# EAGLE board Timelapse_camera_RevB (EAGLE 7.5.0)
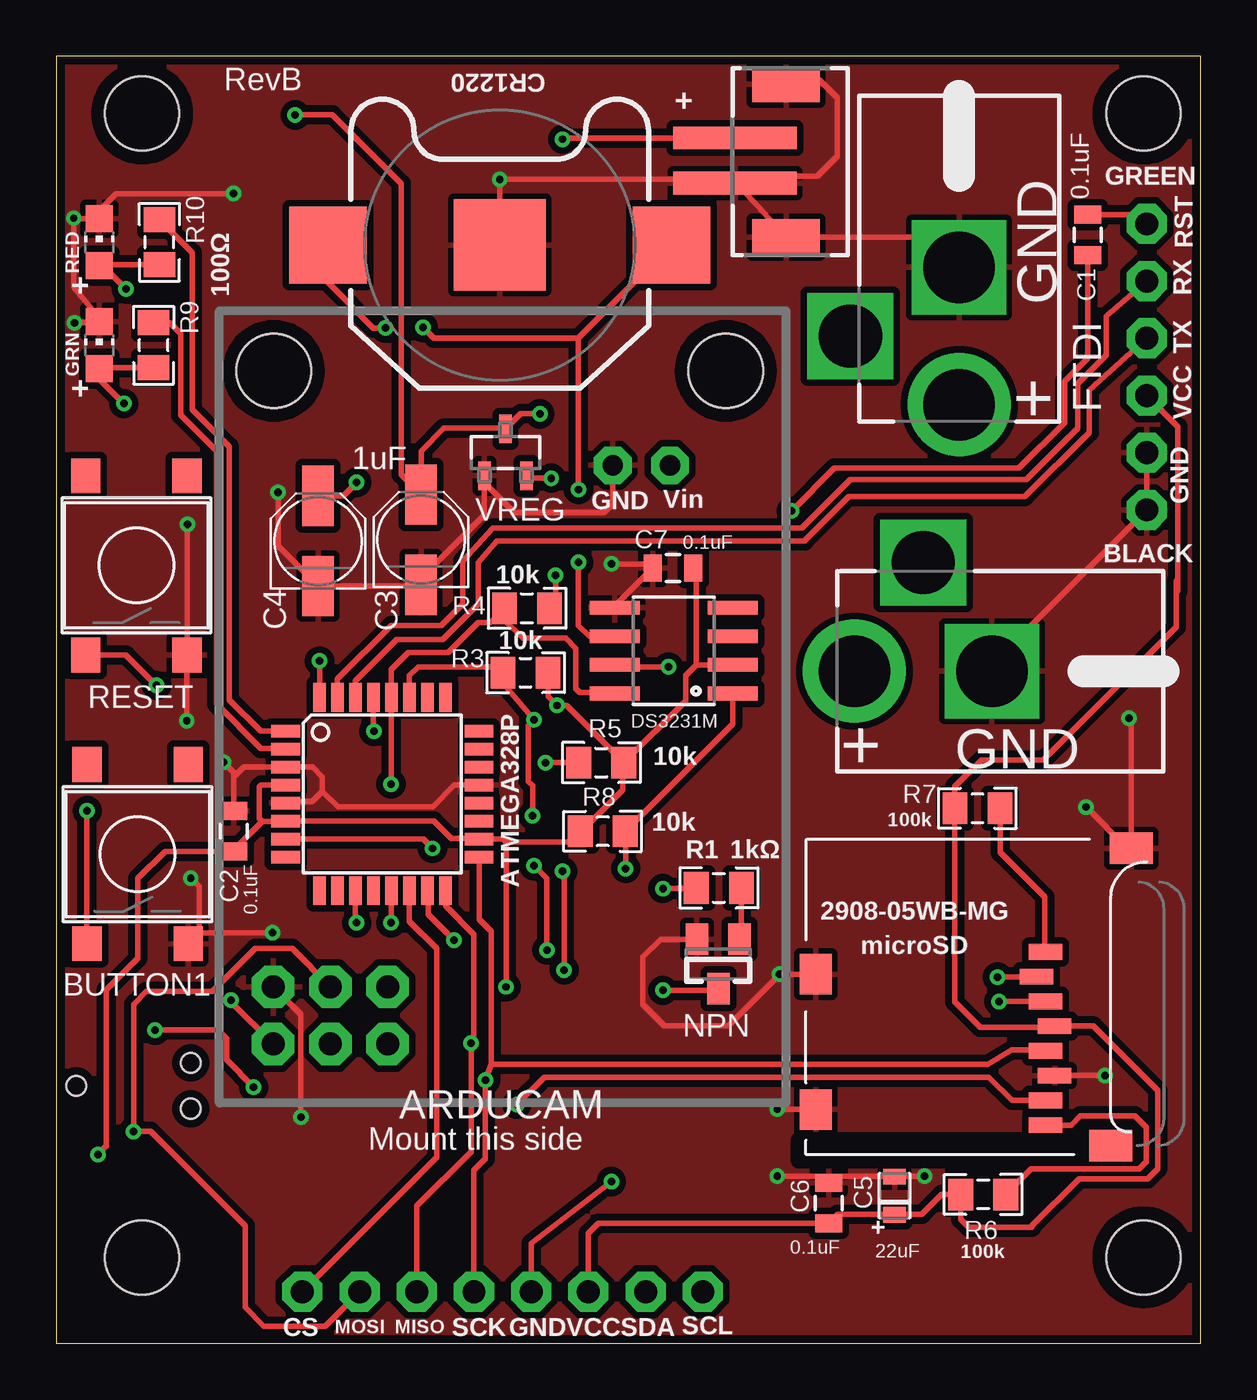
[diagram p0: board, top side]
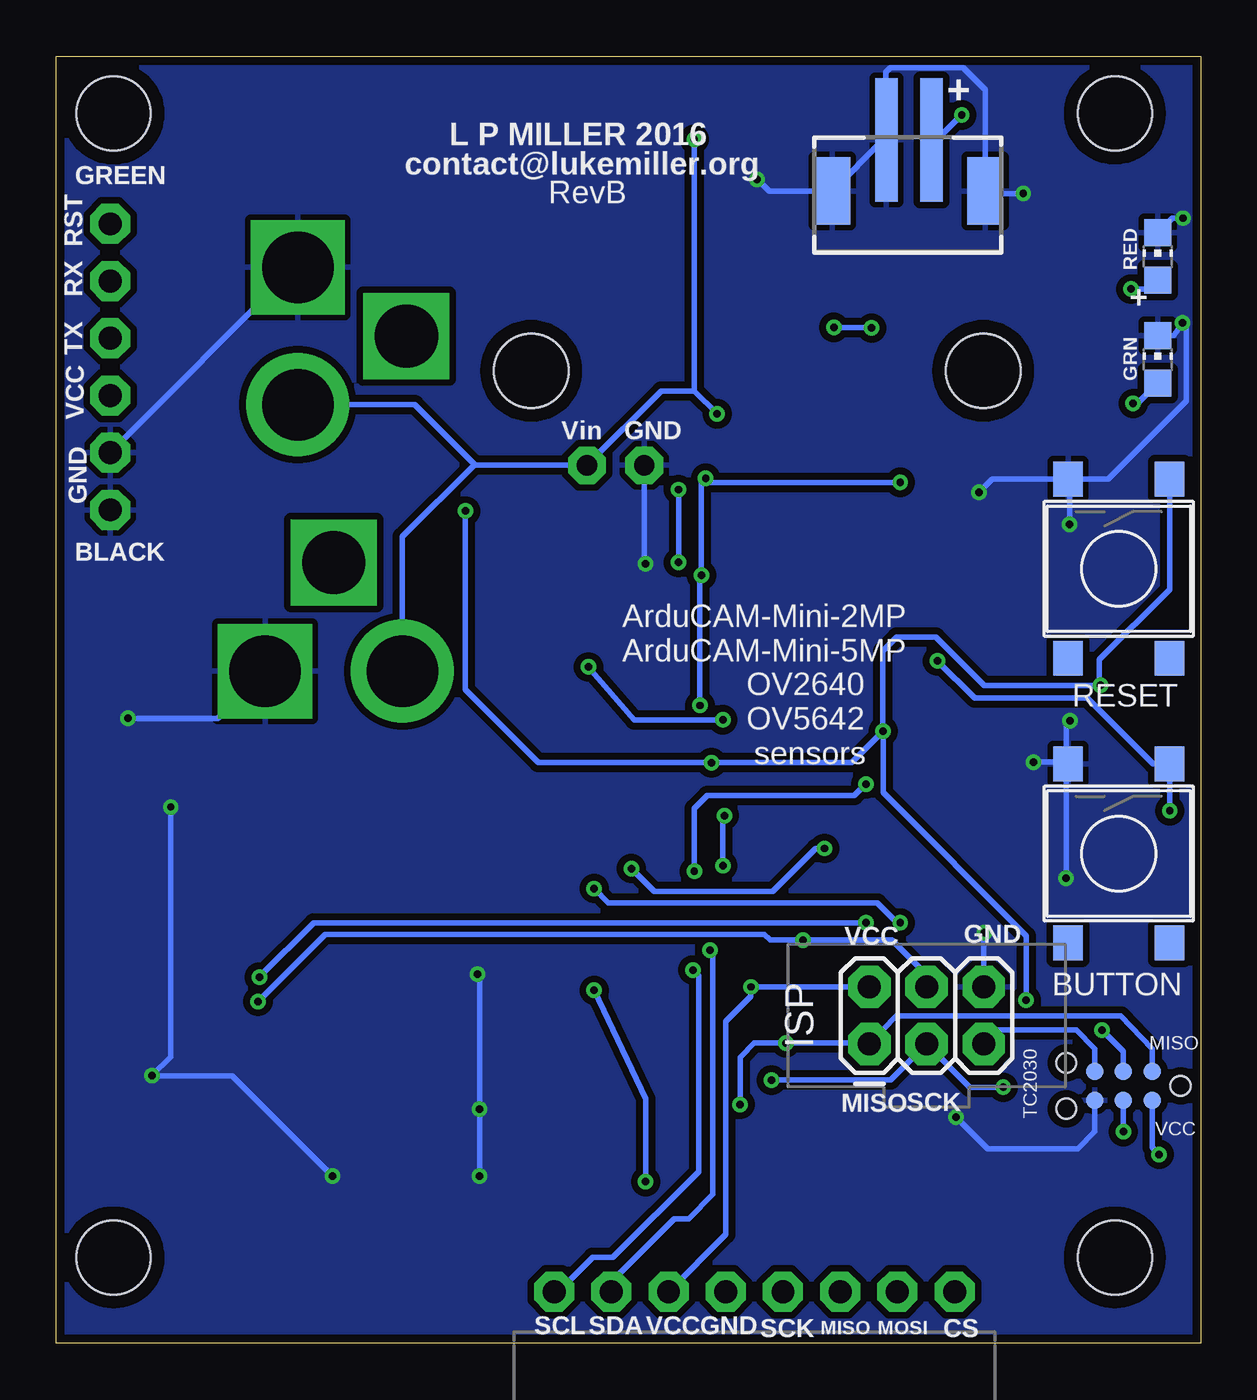
[diagram p1: board, bottom side, seen from below]

Size 50.8 x 57.15 mm. Coordinates in mm from the lower left corner, seen from the top.
Outline: 0,0 50.8,0 50.8,57.15 0,57.15 0,0
Copper layers (1*16): Top 0.0356mm / dielectric 1.5011mm / Bottom 0.0356mm
Design rules "LaenPCBOrder *": minimum track width 6mil, minimum drill 13mil, track to track 6mil, track to pad 6mil, pad to pad 6mil, via to via 6mil, smd to smd 6mil, copper to edge 15mil, drill to drill 6mil, minimum pad ring 7mil, minimum via ring 7mil, stop-mask expansion 3mil, vias tented up to drill 30mil, thermal gap 10mil

## Footprints (pad centres in the part's own frame; a part is rotated, then mirrored left to right if it is on the bottom)
1X08-RA = drill 1.016 pad 1.778 octagon: 1 0,0; 2 2.54,0; 3 5.08,0; 4 7.62,0; 5 10.16,0; 6 12.7,0; 7 15.24,0; 8 17.78,0
PUSHBUTTON_DPST_SMD = smd 1.55 x 1.3: P 3.975,-2.25; P$1 -3.975,-2.25; S 3.975,2.25; S$1 -3.975,2.25
0805 = smd 0.8 x 1.2: 1 -0.9,0; 2 0.9,0
PANASONIC_B = smd 2.667 x 1.4: + 2.006,0; - -2.006,0
C0805_POL = smd 0.7 x 1: P$1_A -0.85,0; P$2_C 0.85,0
DS3231M_SOIC8 = smd 0.61 x 2.21: 1 -1.905,-2.616; 2 -0.635,-2.616; 3 0.635,-2.616; 4 1.905,-2.616; 5 1.905,2.616; 6 0.635,2.616; 7 -0.635,2.616; 8 -1.905,2.616
1X06-CLEANBIG = drill 1.016 pad 1.778 octagon: 1 -6.35,0; 2 -3.81,0; 3 -1.27,0; 4 1.27,0; 5 3.81,0; 6 6.35,0
CHIPLED_0805 = smd 1.2 x 1.2: A 0,-1.05; C 0,1.05
2X3 = drill 1.016 pad 1.88 octagon: 1 -2.54,0; 2 -2.54,2.54; 3 0,0; 4 0,2.54; 5 2.54,0; 6 2.54,2.54
TC2030-MCP-NL = smd 0.787 x 0.787: 1 1.27,-0.635; 2 1.27,0.635; 3 2.54,-0.635; 4 2.54,0.635; 5 3.81,-0.635; 6 3.81,0.635 | hole 0.889: 0,0; 5.08,-1.016; 5.08,1.016
POWER_JACK_DC_2,1MM = drill 3.175 pad 4.572: P$1 0,0 | drill 3.175 square: P$2 6.096,0 | drill 2.8 square: P$3 3.048,4.826
SOT23 = smd 1 x 1.4: 1 -0.95,-1.1; 2 0.95,-1.1; 3 0,1.1
1X02_NOSILK = drill 0.9 pad 1.676 octagon: 1 -1.27,0; 2 1.27,0
R0805 = smd 1.1 x 1.4: 1 -1,0; 2 1,0
STAND-OFF = hole 3.302: 0,0
TQFP32-08 = smd 1.27 x 0.559: 1 -4.293,2.8; 2 -4.293,2; 3 -4.293,1.2; 4 -4.293,0.4; 5 -4.293,-0.4; 6 -4.293,-1.2; 7 -4.293,-2; 8 -4.293,-2.8; 17 4.293,-2.8; 18 4.293,-2; 19 4.293,-1.2; 20 4.293,-0.4; 21 4.293,0.4; 22 4.293,1.2; 23 4.293,2; 24 4.293,2.8 | smd 0.559 x 1.27: 9 -2.8,-4.293; 10 -2,-4.293; 11 -1.2,-4.293; 12 -0.4,-4.293; 13 0.4,-4.293; 14 1.2,-4.293; 15 2,-4.293; 16 2.8,-4.293; 25 2.8,4.293; 26 2,4.293; 27 1.2,4.293; 28 0.4,4.293; 29 -0.4,4.293; 30 -1.2,4.293; 31 -2,4.293; 32 -2.8,4.293
JST-2-SMD-VERT = smd 1 x 5.5: GND 1,-2; VCC -1,-2 | smd 1.6 x 3: P$1 -3.4,0.27; P$2 3.4,0.27
MICROSD = smd 0.7 x 1.5: 1 9,-10.64; 2 7.9,-10.24; 3 6.8,-10.64; 4 5.7,-11.04; 5 4.6,-10.64; 6 3.5,-11.04; 7 2.4,-10.64; 8 1.3,-10.64 | smd 1.8 x 1.4: CD1 2,-0.44; CD2 8,-0.44 | smd 1.4 x 1.9: MT1 0.4,-13.54; MT2 13.6,-14.44
CR1220_BATTERY_HOLDER_SMD = smd 4.064 x 4.064: GND 0,0 | smd 3.429 x 3.429: P$1 -7.62,0; P$2 7.62,0
SOT95P237X112-3N = smd 0.559 x 1.27: 1 -0.94,-1.041; 2 0.94,-1.041; 3 0,1.041

## Placement (x,y rotation side)
ARDUCAM  [1X08-RA]  10.92,2.29 180 bottom
BUTTON1  [PUSHBUTTON_DPST_SMD]  3.61,21.72 90 top
BUTTON2  [PUSHBUTTON_DPST_SMD]  3.63,21.74 270 bottom
C1  0.1 uF  [0805]  45.78,49.21 270 top
C2  0.1 uF  [0805]  7.87,22.73 90 top
C3  1 uF  [PANASONIC_B]  16.19,35.69 90 top
C4  1 uF  [PANASONIC_B]  11.62,35.62 90 top
C5  22 uF tant  [C0805_POL]  37.21,6.55 90 top
C6  0.1 uF  [0805]  34.29,6.22 90 top
C7  0.1 uF  [0805]  27.37,34.42 0 top
DS3231M  DS3231MSOIC-8  [DS3231M_SOIC8]  27.41,30.76 90 top
FTDI  [1X06-CLEANBIG]  48.41,43.36 270 top
GRN  LED_SMD  [CHIPLED_0805]  1.91,44.32 0 top
GRNLED1  LED_SMD  [CHIPLED_0805]  1.91,43.69 0 bottom
ISP  AVR_SPI_PRG_6PTH  [2X3]  12.17,13.28 0 bottom
J1  [TC2030-MCP-NL]  0.89,11.43 180 bottom
JACK1  POWER_JACK_2,1MM  [POWER_JACK_DC_2,1MM]  40.08,41.68 90 top
JACK2  POWER_JACK_2,1MM  [POWER_JACK_DC_2,1MM]  35.43,29.84 0 top
NPN  KSC1623_BJT_TRANSISTOR  [SOT23]  29.39,16.84 180 top
POWERIN  PINHD-1X2NOSILK  [1X02_NOSILK]  25.97,38.99 180 top
R1  1k Ω  [R0805]  29.41,20.22 0 top
R3  10k Ω  [R0805]  20.83,29.78 0 top
R4  10k Ω  [R0805]  20.89,32.64 0 top
R5  10k Ω  [R0805]  24.19,25.78 0 top
R6  100k Ω  [R0805]  41.15,6.6 180 top
R7  100k Ω  [R0805]  40.89,23.75 180 top
R8  10k Ω  [R0805]  24.26,22.73 180 top
R9  510 Ω  [R0805]  4.32,44.32 90 top
R10  510 Ω  [R0805]  4.57,48.9 90 top
RED  LED_SMD  [CHIPLED_0805]  1.91,48.9 0 top
REDLED1  LED_SMD  [CHIPLED_0805]  1.91,48.26 0 bottom
RESET  [PUSHBUTTON_DPST_SMD]  3.56,34.54 90 top
RESET1  [PUSHBUTTON_DPST_SMD]  3.63,34.39 270 bottom
STANDOFF1  STAND-OFF  [STAND-OFF]  48.26,3.81 0 top
STANDOFF2  STAND-OFF  [STAND-OFF]  48.26,54.61 0 top
STANDOFF3  STAND-OFF  [STAND-OFF]  3.81,3.81 0 top
STANDOFF4  STAND-OFF  [STAND-OFF]  3.81,54.61 0 top
STANDOFF5  STAND-OFF  [STAND-OFF]  9.65,43.18 0 top
STANDOFF6  STAND-OFF  [STAND-OFF]  29.72,43.18 0 top
U1  ATMEGA328P  [TQFP32-08]  14.48,24.38 0 top
U$2  JST-2PIN  [JST-2-SMD-VERT]  12.95,51.44 180 bottom
U$3  MICROSD  [MICROSD]  33.27,8.38 90 top
U$6  JST-2PIN  [JST-2-SMD-VERT]  32.13,52.51 270 top
U$10  BATTERY_BUTTON_CELLCR1220_SMD  [CR1220_BATTERY_HOLDER_SMD]  19.68,48.77 0 top
VREG  MCP1700T-3302E/TT  [SOT95P237X112-3N]  19.94,39.56 0 top

## Library data of the parts
ARDUCAM BUTTON1 BUTTON2 C1-C7 DS3231M FTDI GRN GRNLED1 ISP J1 JACK1 JACK2 NPN POWERIN R1 R3-R10 RED REDLED1 RESET RESET1 STANDOFF1-STANDOFF6 U1 U$2 U$3 U$6 U$10 = miller
VREG = Microchip_By_element14_Batch_1; MPN: MCP1700T-3302E/TT; OC_FARNELL: 1296592; OC_NEWARK: 88H9817; PACKAGE: SOT23-3; SUPPLIER: Microchip

## Nets
32KHZ: DS3231M.1 R8.1 U1.7
CAM_GND: ARDUCAM.5 NPN.3
CD1: U$3.MT1
CS_CAM: ARDUCAM.1 U1.14
CS_SD: U1.13 U$3.2
DTR: C1.1 FTDI.1
GND: BUTTON1.P$1 BUTTON2.P$1 C2.2 C3.- C4.- C5.P$2_C C6.2 C7.1 DS3231M.5 FTDI.5 FTDI.6 GRN.C GRNLED1.C ISP.6 J1.6 JACK1.P$2 JACK2.P$2 NPN.2 POWERIN.2 RED.C REDLED1.C RESET1.P$1 RESET.P$1 U1.3 U1.5 U1.21 U$2.GND U$2.P$1 U$2.P$2 U$3.6 U$3.CD1 U$3.CD2 U$3.MT2 U$6.GND U$6.P$1 U$6.P$2 U$10.GND VREG.1
GRNLED: R9.2 U1.2
INT0: BUTTON1.S$1 BUTTON2.S$1 U1.32
MISO: ARDUCAM.3 ISP.1 J1.1 U1.16 U$3.7
MOSI: ARDUCAM.2 ISP.4 J1.4 U1.15 U$3.3
N$1: NPN.1 R1.2
N$2: R7.1 U$3.1
N$3: R6.1 U$3.8
N$8: GRN.A GRNLED1.A R9.1
N$9: R10.1 RED.A REDLED1.A
NPN_BASE: R1.1 U1.11
REDLED: R10.2 U1.1
RESET: C1.2 ISP.5 J1.5 R5.1 RESET1.S$1 RESET.S$1 U1.29
SCK: ARDUCAM.4 ISP.3 J1.3 U1.17 U$3.5
SCL: ARDUCAM.8 DS3231M.8 R4.1 U1.28
SDA: ARDUCAM.7 DS3231M.7 R3.1 U1.27
TO_FTDI_RX: FTDI.2 U1.31
TO_FTDI_TX: FTDI.3 U1.30
VBAT: DS3231M.6 U$10.P$1 U$10.P$2
VCC: ARDUCAM.6 C2.1 C4.+ C5.P$1_A C6.1 C7.2 DS3231M.2 FTDI.4 ISP.2 J1.2 R3.2 R4.2 R5.2 R6.2 R7.2 R8.2 U1.4 U1.6 U1.18 U$3.4 VREG.2
VIN: C3.+ JACK1.P$1 JACK2.P$1 POWERIN.1 U$2.VCC U$6.VCC VREG.3

## Tracks (layer width: path | path; a pad name or v marks a point on that pad's centre or on a via)
32KHZ  (via drill 0.33)
  Top 0.254: DS3231M.1 30.02,27.5 R8.1 25.27,22.72 v25.27,21.08 | U1.7 16.29,22.38 v16.7,21.97
  Bottom 0.254: v16.7,21.97 17.08,21.97 18.99,20.07 24.26,20.07 v25.27,21.08
CAM_GND  (via drill 0.33)
  Top 0.254: ARDUCAM.5 21.08,4.45 v24.64,7.18 | v26.92,15.67 29.32,15.67 NPN.3
  Bottom 0.254: v24.64,7.18 24.64,10.85 v26.92,15.67
CS_CAM
  Top 0.254: U1.14 15.68,18.74 16.89,17.53 16.89,8.26 ARDUCAM.1
CS_SD  (via drill 0.33)
  Top 0.254: U1.13 14.88,18.69 v14.86,18.67 | v41.78,16.26 43.49,16.26 U$3.2
  Bottom 0.254: v14.86,18.67 39.37,18.67 v41.78,16.26
DTR
  Top 0.254: C1.1 48.01,50.11 FTDI.1
GND  (via drill 0.33)
  Top 0.254: v9.59,18.22 6.34,18.22 | 6.34,18.22 BUTTON1.P$1 | v46.56,11.89 U$3.6 | 34.57,7.4 C5.P$2_C 38.52,7.4 v38.54,7.43 | 34.57,7.4 C6.2 | U$3.CD1 32.01,10.38 v32,10.39 | U$3.CD2 v32.11,16.38 29.82,14.1 26.99,14.1 26.04,15.05 26.04,17.14 26.83,17.94 NPN.2 | 34.57,7.4 32.03,7.4 v32,7.43 | DS3231M.5 24.79,32.74 C7.1 26.28,34.61 v24.64,34.61 | 11.81,24.51 11.81,25.15 11.37,25.58 U1.3 8.32,25.59 7.87,25.15 | 11.81,24.51 11.37,24.07 10.27,24.07 U1.5 | FTDI.5 FTDI.6 41.53,30.12 JACK2.P$2 | v47.62,27.75 47.71,27.66 U$3.MT2 47.55,21.98 v45.72,23.81 | v10.86,10.03 10.86,14.59 ISP.6 | U1.21 17.67,24.78 16.7,23.81 12.51,23.81 11.81,24.51 | C2.2 7.87,25.15 | 7.87,25.15 7.87,25.35 v7.42,25.81 | 6.34,18.22 6.34,20.28 v5.97,20.65 | v0.8,45.31 1.85,45.31 GRN.C 1.91,45.52 0.78,46.9 v0.78,49.96 0.98,49.95 RED.C 1.91,50.29 2.67,51.05 v7.87,51.05 | U$10.GND v19.68,51.69 30.11,51.69 U$6.GND | v9.84,37.78 9.84,35.4 C4.- 16.13,33.62 C3.- 16.19,33.97 18.99,36.77 18.99,38.51 VREG.1 19,38.21 20.32,36.89 24.32,36.89 24.7,37.27 POWERIN.2 | v5.79,27.64 5.79,30.55 RESET.P$1 5.81,36.36 v5.82,36.37 | U$6.P$1 33.87,56.1 34.67,55.31 34.67,52.7 33.78,51.82 30.24,51.82 U$6.GND | U$6.GND 30.13,51.58 U$6.P$2 38.94,49.11 JACK1.P$2
  Bottom 0.254: ISP.6 9.63,18.19 v9.59,18.22 | v32.11,16.38 32,16.28 v32,10.39 v32,7.43 | v47.62,27.75 43.62,27.75 JACK2.P$2 | v45.72,23.81 45.72,12.72 v46.56,11.89 46.55,11.87 42.99,11.87 v38.54,7.43 | J1.6 4.7,9.4 5.46,8.64 9.46,8.64 v10.86,10.03 | v7.42,25.81 5.97,25.81 | 5.97,25.81 BUTTON2.P$1 5.97,25.63 v5.97,20.65 | GRNLED1.C 1.19,44.74 v0.8,45.31 0.64,45.29 0.64,41.83 4.1,38.37 RESET1.P$1 | v0.78,49.96 1.25,49.96 REDLED1.C | v7.87,51.05 9.44,51.05 U$2.P$1 9.55,55.66 10.54,56.64 13.78,56.64 13.97,56.45 13.97,53.45 U$2.GND 14.08,53.44 U$2.P$2 19.16,51.16 v19.68,51.69 | RESET1.P$1 9.26,38.37 v9.84,37.78 | 5.97,25.81 5.97,27.45 v5.79,27.64 | v5.82,36.37 5.82,38.3 RESET1.P$1 | JACK1.P$2 40.18,47.78 FTDI.5 | POWERIN.2 24.7,34.67 v24.64,34.61
  pour Top (isolate 0.305): 0,-0.05 50.8,-0.05 50.8,57.15 0,57.15
  pour Bottom (isolate 0.305): 0,0 50.8,0 50.8,57.15 0,57.15
GRNLED
  Top 0.254: R9.2 5.03,45.32 5.52,44.83 5.52,41.21 7.11,39.62 7.11,28.38 9.08,26.42 10.15,26.42 U1.2
INT0  (via drill 0.33)
  Top 0.254: BUTTON1.S$1 1.36,23.63 v1.37,23.65 | v11.68,30.3 U1.32
  Bottom 0.254: v1.37,23.65 1.37,25.71 BUTTON2.S$1 2.1,25.72 5.03,28.65 10.03,28.65 v11.68,30.3
MISO  (via drill 0.33)
  Top 0.254: U1.16 17.28,19.43 18.54,18.16 18.54,13.46 v18.41,13.34 18.41,8.51 16,6.1 ARDUCAM.3 | U$3.7 42.43,10.78 41.4,11.81 21.65,11.81 v20.45,10.6
  Bottom 0.254: J1.1 2.16,13.08 3.56,14.54 13.51,14.54 ISP.1 14.76,13.34 v18.41,13.34 19.81,13.34 20.45,12.7 v20.45,10.6
MOSI  (via drill 0.33)
  Top 0.254: v17.65,17.91 16.51,19.05 16.51,20.06 U1.15 | ISP.4 10.46,17.53 8.83,17.53 6.92,15.62 4,15.62 3.43,15.05 v3.43,9.4 4.19,9.4 8.38,5.21 8.38,1.59 9.21,0.76 11.94,0.76 ARDUCAM.2 | v41.85,15.18 U$3.3
  Bottom 0.254: ISP.4 12.17,16.36 13.72,17.91 v17.65,17.91 19.11,17.91 19.37,18.16 38.86,18.16 v41.85,15.18 | J1.4 v3.43,9.4
N$1
  Top 0.254: R1.2 30.41,18.02 NPN.1
N$2
  Top 0.254: R7.1 41.89,21.8 43.88,19.81 43.88,17.42 U$3.1
N$3
  Top 0.254: U$3.8 45.05,9.68 45.47,10.1 47.88,10.1 48.39,9.59 48.39,8.06 48.07,7.75 43.29,7.75 R6.1
N$8  (via drill 0.33)
  Top 0.254: R9.1 1.96,43.32 GRN.A 1.91,42.82 v3,41.73
  Bottom 0.254: v3,41.73 2.81,41.73 GRNLED1.A
N$9  (via drill 0.33)
  Top 0.254: R10.1 1.96,47.9 RED.A 2.07,47.84 v3.1,46.81
  Bottom 0.254: v3.1,46.81 2.3,46.81 REDLED1.A
NPN_BASE  (via drill 0.33)
  Top 0.254: U1.11 13.28,18.73 v13.34,18.67 | v26.92,20.19 28.39,20.19 R1.1
  Bottom 0.254: v13.34,18.67 13.46,18.67 14.35,19.56 26.29,19.56 v26.92,20.19
REDLED
  Top 0.254: U1.1 9.07,27.18 7.68,28.57 7.68,39.81 6.03,41.47 6.03,48.43 R10.2
RESET  (via drill 0.33)
  Top 0.254: U1.29 14.08,27.2 v14.1,27.18 | v7.75,15.24 7.75,15.16 ISP.5 | R5.1 v21.72,25.78 | C1.2 45.78,43.75 44.77,42.74 44.77,40.89 42.74,38.86 34.54,38.86 v32.64,36.96 | RESET.S$1 3.09,30.57 v4.45,29.21
  Bottom 0.254: J1.5 4.7,13.08 5.52,13.91 9,13.91 ISP.5 | v14.1,27.18 14.1,24.45 7.75,18.1 v7.75,15.24 | v14.1,27.18 15.49,25.78 v21.72,25.78 29.4,25.78 32.64,29.02 v32.64,36.96 | v14.1,27.18 14.12,27.2 14.12,30.73 13.49,31.37 11.76,31.37 9.6,29.21 v4.45,29.21 4.5,29.26 4.5,30.35 1.38,33.47 RESET1.S$1
SCK  (via drill 0.33)
  Top 0.254: U1.17 18.77,18.82 19.3,18.29 19.3,12.38 | 19.3,12.38 v19.05,11.68 19.05,8.19 18.54,7.68 ARDUCAM.4 | v4.38,13.91 7.18,13.91 7.56,13.53 7.56,12.57 v8.76,11.37 | 19.3,12.38 41.34,12.38 42.42,13.02 43.95,13.02 | 44.51,13.02 43.95,13.02 | 43.95,13.02 U$3.5
  Bottom 0.254: v19.05,11.68 13.77,11.68 ISP.3 10.25,11.37 v8.76,11.37 | J1.3 3.43,12.95 v4.38,13.91
SCL  (via drill 0.33)
  Top 0.254: DS3231M.8 24.75,28.89 23.24,28.89 23.05,29.08 23.05,30.86 22.61,31.3 20.7,31.3 19.89,32.12 R4.1 19.26,32 18.73,32 17.4,30.67 15.62,30.67 14.88,29.93 U1.28 14.86,28.66 v14.86,24.83 | v22.54,16.57 22.54,20.89 v22.48,20.95
  Bottom 0.254: ARDUCAM.8 28.51,2.29 26.99,3.81 26.1,3.81 22.29,7.62 22.29,16.32 v22.54,16.57 | v22.48,20.95 22.48,23.75 21.91,24.32 15.37,24.32 v14.86,24.83
SDA  (via drill 0.33)
  Top 0.254: U1.27 15.68,29.65 16.07,30.04 19.57,30.04 R3.1 19.83,29.32 v21.21,27.69 20.95,27.43 20.95,24.96 21.14,24.77 v21.14,23.43 | v27.18,30.04 24.88,30.04 DS3231M.7 | v21.78,17.46 21.78,20.64 v21.21,21.21
  Bottom 0.254: v21.21,27.69 25.15,27.69 v27.18,30.04 | ARDUCAM.7 26.16,2.73 23.37,5.52 22.73,5.52 21.65,6.6 21.65,17.34 v21.78,17.46 | v21.21,21.21 21.21,23.37 v21.14,23.43
TO_FTDI_RX
  Top 0.254: U1.31 12.48,29.5 14.86,31.88 17.08,31.88 18.03,32.83 18.03,34.73 19.37,36.2 33.08,36.2 35.24,38.35 43.05,38.35 45.34,40.64 45.34,42.61 46.61,43.88 46.61,45.62 FTDI.2
TO_FTDI_TX
  Top 0.254: U1.30 13.28,29.41 15.11,31.24 17.14,31.24 18.73,32.83 18.73,34.67 19.56,35.62 33.21,35.62 35.18,37.59 42.99,37.59 45.85,40.45 45.85,42.32 FTDI.3
VBAT  (via drill 0.33)
  Top 0.254: DS3231M.6 23.66,31.39 23.18,31.88 v23.18,34.67 | v23.18,37.91 23.18,44.64 | 23.18,44.64 U$10.P$2 | U$10.P$1 12.06,47.09 14.07,45.09 v14.61,45.09 | 23.18,44.64 16.75,44.64 v16.28,45.11
  Bottom 0.254: v23.18,34.67 v23.18,37.91 | v16.28,45.11 14.63,45.11 v14.61,45.09
VCC  (via drill 0.33)
  Top 0.254: 19.96,22.25 19.83,22.38 U1.18 18.74,22.42 17.53,22.42 16.76,23.18 U1.6 9.14,23.18 | 19.96,22.25 v19.96,15.82 | 37.22,5.71 38.42,5.71 39.31,6.6 R6.2 40.15,5.51 40.51,5.14 43.31,5.14 43.31,5.21 45.4,7.3 48.45,7.3 48.9,7.75 48.9,11.24 46.04,14.1 44.33,14.1 U$3.4 44.27,14.03 41.02,14.03 39.89,15.16 R7.2 39.89,24.72 41.08,25.91 43.81,25.91 49.72,31.81 49.72,33.85 49.78,33.91 | 37.22,5.71 C5.P$1_A | 37.22,5.71 34.68,5.71 C6.1 34.28,5.33 24.07,5.33 23.62,4.89 ARDUCAM.6 | R3.2 21.83,28.72 v22.23,28.32 22.65,28.32 R5.2 | v22.16,34.1 22.16,32.91 R4.2 | DS3231M.2 28.41,30.12 | 28.41,30.12 27.94,29.65 27.94,28.53 R5.2 | 28.41,30.12 28.41,34.28 C7.2 | 19.96,22.25 22.77,22.25 R8.2 23.3,22.73 25.15,24.57 25.15,25.73 R5.2 | U1.4 9.1,24.78 9.02,24.7 9.02,23.3 9.14,23.18 | 49.78,33.4 49.78,33.91 | 49.78,33.91 49.78,40.72 FTDI.4 | v1.84,8.38 2.22,8.76 2.22,15.68 3.62,17.08 3.62,20.64 4.83,21.84 7.86,21.84 C2.1 7.87,21.91 9.14,23.18 | v21.97,38.42 20.98,38.42 VREG.2 | C4.+ 12.74,37.63 v13.34,38.23
  Bottom 0.254: ISP.2 v19.96,15.82 19.96,15.4 21.08,14.29 21.08,4.83 ARDUCAM.6 | v22.23,28.32 22.23,34.04 v22.16,34.1 22.16,38.23 v21.97,38.42 21.78,38.23 v13.34,38.23 | J1.2 2.16,8.7 v1.84,8.38
VIN  (via drill 0.33)
  Top 0.254: v10.6,54.55 12.26,54.55 15.3,51.5 15.3,38.58 C3.+ 16.19,39.62 17.21,40.64 19.9,40.64 VREG.3 20.61,41.27 v21.46,41.27 | U$6.VCC 22.53,53.51 v22.48,53.47
  Bottom 0.254: U$2.VCC 11.72,53.44 v10.6,54.55 | v22.48,53.47 22.48,42.29 | 22.48,42.29 v21.46,41.27 | JACK1.P$1 34.89,41.68 32.23,39.02 | 32.23,39.02 32.19,38.99 POWERIN.1 23.94,42.29 22.48,42.29 | JACK2.P$1 35.43,35.81 32.23,39.02

## Text on the board
tPlace: RevB | CR1220 | + | 0.1uF | GREEN | RST | RX | + | 100Ω | TX | + | VCC | 1uF | GND | Vin | GND | 0.1uF | 10k | BLACK | 10k | ATMEGA328P | 10k | 10k | 100k | 1kΩ | 0.1uF | 2908-05WB-MG | microSD | Mount this side | 0.1uF | 22uF | 100k | CS | MOSI | MISO | SCK | GND | VCC | SDA | SCL
bPlace: + | L P MILLER 2016 | contact@lukemiller.org | RevB | GREEN | RED | RST | + | RX | GRN | TX | VCC | GND | Vin | GND | BLACK | ArduCAM-Mini-2MP / ArduCAM-Mini-5MP | OV2640 / OV5642 / sensors | RESET | GND | VCC | BUTTON | MISO | TC2030 | SCK | MISO | VCC | CS | MOSI | MISO | SCK | GND | VCC | SDA | SCL